# Altium PCB ADCS_Sensor_Simulator_FIXED3-4-15.PcbDoc
Units mm, origin at the board's own origin, x right, y up, seen from the top; angles counter-clockwise.
Board outline 44.83 x 79.25 mm, 2 copper layers (Top Layer, Bottom Layer); 45 components, 40 nets, 211 pads, 56 vias.
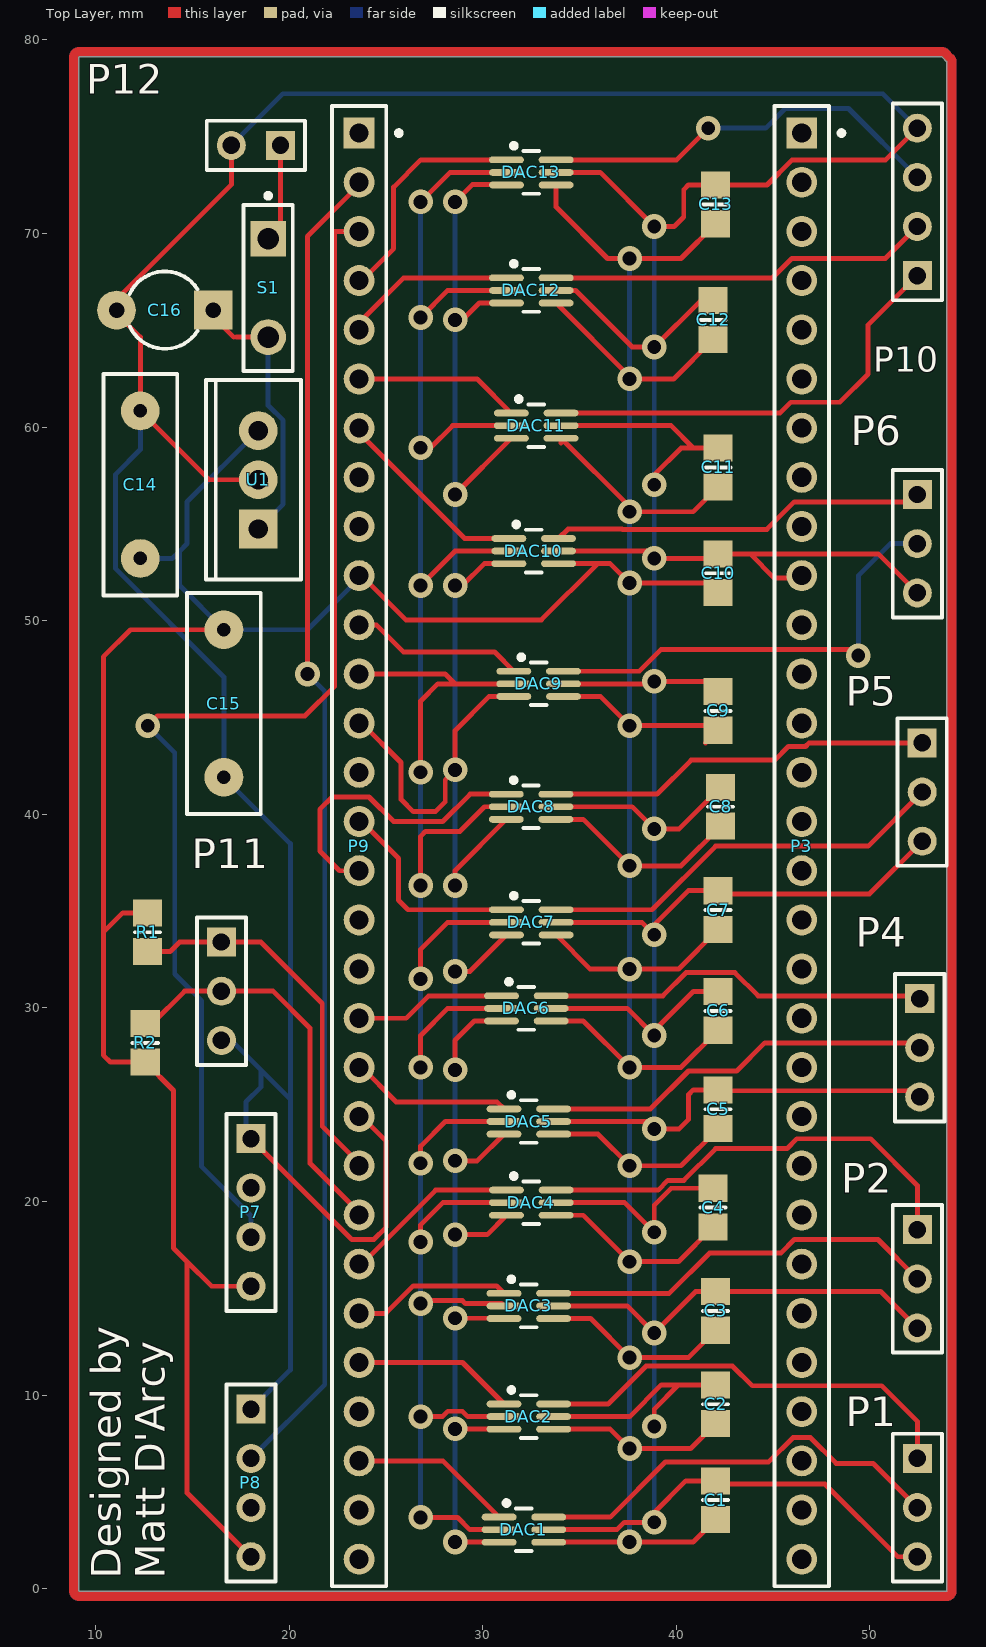
[diagram p0: Top Layer view]
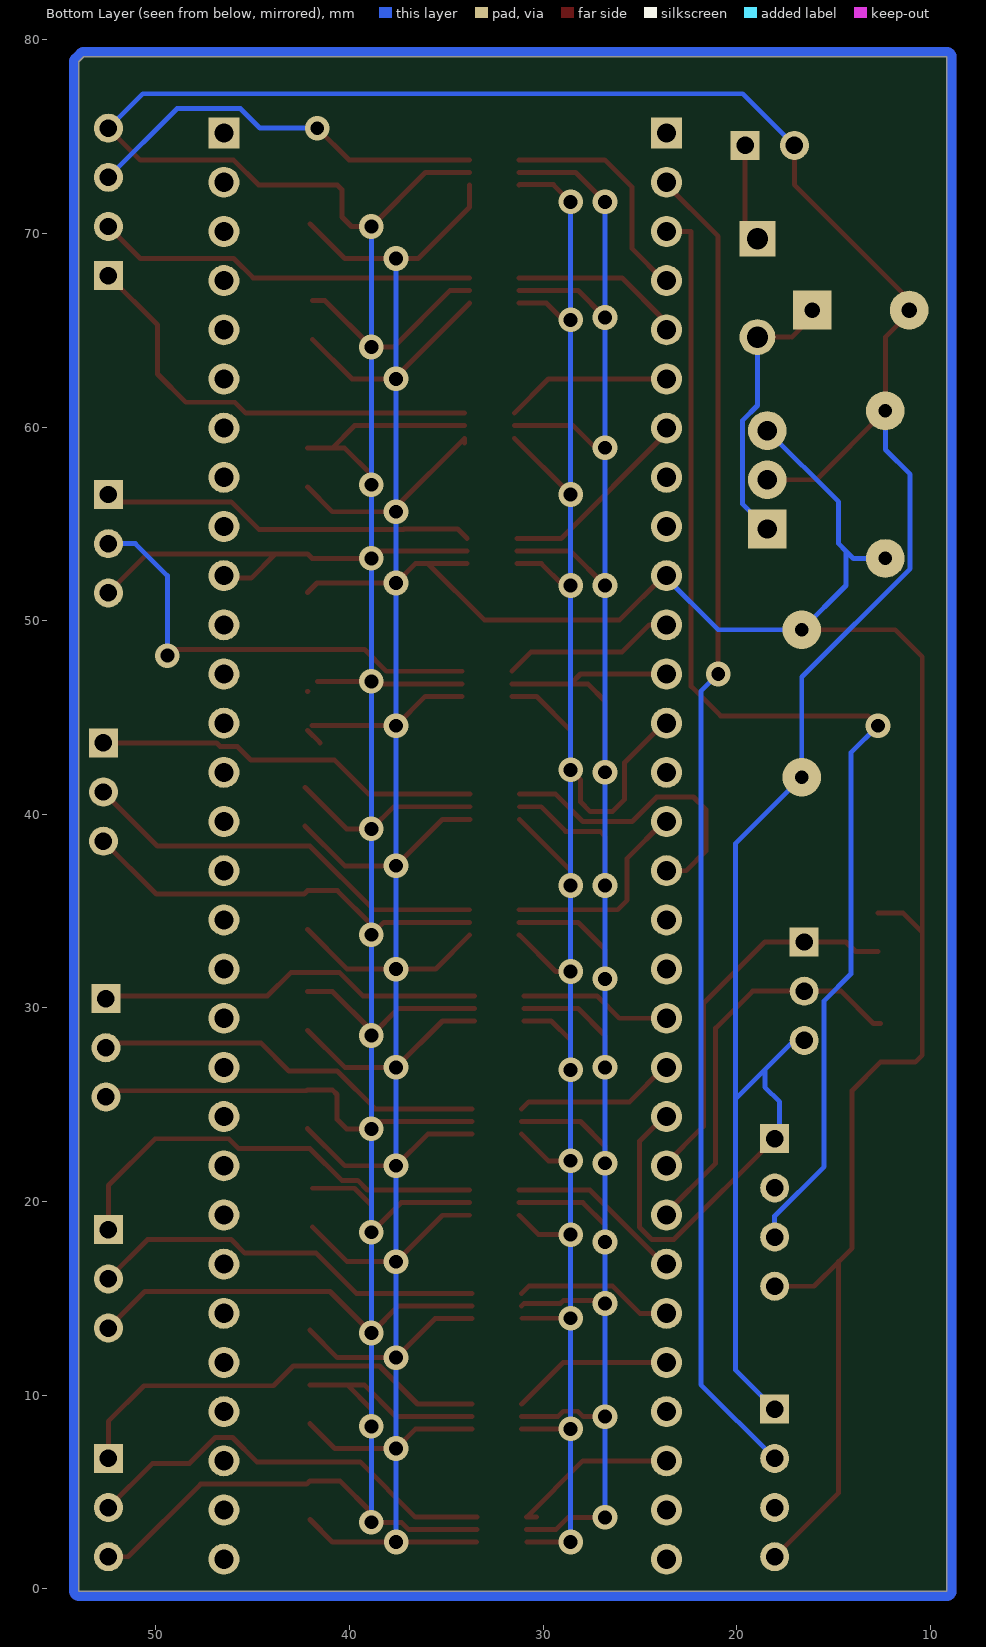
[diagram p1: Bottom Layer view, seen from below]

## Layer stack, top to bottom
Top Layer: signal copper 0.0356
Dielectric: dielectric 0.32, FR-4, Dk 4.8
Bottom Layer: signal copper 0.0356

## Board outline
9.144,78.994 9.144,-0.127 53.975,-0.127 53.975,78.867 53.721,79.121 9.144,79.121

## Design rules (kind name [scope] priority, off if disabled: settings)
Clearance [All] p1: gap=0.15
PolygonConnect [All] p1: connectstyle=Relief reliefconductorwidth=0.254 reliefentries=4 polygonreliefangle="90 Angle" airgapwidth=0.254
RoutingVias [All] p1: holewidth=0.711 width=1.27 viastyle="Through Hole" minholewidth=0.711 minwidth=1.27 maxholewidth=0.711 maxwidth=1.27
SolderMaskExpansion [All] p1: expansion=0.102
Width [All] p1: maxlimit=0.254 minlimit=0.254 preferedwidth=0.254
28 further rules are at their usual default settings.

## Components (designator, comment, footprint, x,y, rotation, side; value= is the part's Value field where it differs from the comment)
C1 "Regulator" 6-0805_M 42.037,4.572 r90 top
C2 "Regulator" 6-0805_M 42.037,9.525 r90 top
C3 "Regulator" 6-0805_M 42.037,14.351 r90 top
C4 "Regulator" 6-0805_M 41.91,19.685 r90 top
C5 "Regulator" 6-0805_M 42.164,24.765 r90 top
C6 "Regulator" 6-0805_M 42.164,29.845 r90 top
C7 "Regulator" 6-0805_M 42.164,35.052 r90 top
C8 "Regulator" 6-0805_M 42.291,40.386 r90 top
C9 "Regulator" 6-0805_M 42.164,45.339 r90 top
C10 "Regulator" 6-0805_M 42.164,52.451 r90 top
C11 "Regulator" 6-0805_M 42.164,57.912 r90 top
C12 "Regulator" 6-0805_M 41.91,65.532 r90 top
C13 "Regulator" 6-0805_M 42.037,71.501 r90 top
C14 "Regulator" RAD-0.3 12.319,57.023 r90 top
C15 "Regulator" RAD-0.3 16.637,45.72 r270 top
C16 "Bypass" CAPR5-4X5 13.589,66.04 r180 top
DAC1 "LTC2630" LTC2630 32.131,3.048 r0 top
DAC2 "LTC2630" LTC2630 32.385,8.89 r0 top
DAC3 "LTC2630" LTC2630 32.385,14.605 r0 top
DAC4 "LTC2630" LTC2630 32.512,19.939 r0 top
DAC5 "LTC2630" LTC2630 32.385,24.13 r0 top
DAC6 "LTC2630" LTC2630 32.258,29.972 r0 top
DAC7 "LTC2630" LTC2630 32.512,34.417 r0 top
DAC8 "LTC2630" LTC2630 32.501,40.386 r0 top
DAC9 "LTC2630" LTC2630 32.893,46.736 r0 top
DAC10 "LTC2630" LTC2630 32.639,53.594 r0 top
DAC11 "LTC2630" LTC2630 32.766,60.071 r0 top
DAC12 "LTC2630" LTC2630 32.512,67.056 r0 top
DAC13 "LTC2630" LTC2630 32.512,73.152 r0 top
P1 "Sun1" HDR1X3 52.451,6.731 r270 top
P2 "Sun2" HDR1X3 52.451,18.542 r270 top
P3 "ATMEGA128-RIGHT" HDR1X30 46.482,75.184 r270 top
P4 "Sun3" HDR1X3 52.578,30.48 r270 top
P5 "Sun4" HDR1X3 52.705,43.688 r270 top
P6 "Sun5" HDR1X3 52.451,56.515 r270 top
P7 "Serial-ToPC" HDR1X4 18.034,23.241 r270 top
P8 "Serial-FromPC" HDR1X4 18.034,9.271 r270 top
P9 "ATMEGA128-LEFT" HDR1X30 23.622,75.184 r270 top
P10 "Mag" HDR1X4 52.451,67.818 r90 top
P11 "Gyro I2C" HDR1X3 16.51,33.401 r270 top
P12 "12V In" HDR1X2 19.558,74.549 r180 top
R1 "SCL Pullup" 6-0805_M 12.7,33.909 r270 top
R2 "SDA Pullup" 6-0805_M 12.573,28.194 r90 top
S1 "ON/OFF" SPST-2 18.923,67.183 r270 top
U1 "MC7800" 221A-06 18.415,57.277 r90 top

## Footprints (in the part's own frame and the unit in brackets; to place one, negate y for a bottom-side part, rotate by r counter-clockwise, add the part's x,y. Pads: shape width x height; smd on the part's side, far side on the other; paste and mask are expansions set on the pad)
6-0805_M [mm] "Chip Resistor, Body 2.0x1.2mm, IPC Low Density"
  rect 1.4x1.5 smd: 1(-1,0) 2(1,0)
  silkscreen extent 0,-0.65 0,0.65, body extent -1.07,-0.7 1.07,0.7, height 0.7
221A-06 [mm] "TO, Thru-Hole, Vertical, Heatsink Mounted; 3 In-Line Leads; Pitch 2.54 mm"
  rect 2x2 hole 1: 1(-2.54,0)
  round 2 hole 1: 2(0,0) 3(2.54,0)
  silkscreen extent -5.15,-2.2 5.15,2.7
CAPR5-4X5 [mm] "Capacitor; 2 Leads"
  rect 2x2 hole 0.8: 1(-2.5,0)
  round 2 hole 0.8: 2(2.5,0)
  silkscreen extent -1.69,-2 1.82,2
HDR1X2 [mm] "Connector; Header; 2 Position"
  rect 1.5x1.5 hole 0.9: 1(0,0)
  round 1.5 hole 0.9: 2(2.54,0)
  silkscreen extent -1.27,-1.27 3.81,1.27
HDR1X3 [mm] "Connector; Header; 3 Position"
  rect 1.5x1.5 hole 0.9: 1(0,0)
  round 1.5 hole 0.9: 2(2.54,0) 3(5.08,0)
  silkscreen extent -1.27,-1.27 6.35,1.27
HDR1X4 [mm] "Connector; Header; 4 Position"
  rect 1.5x1.5 hole 0.9: 1(0,0)
  round 1.5 hole 0.9: 2(2.54,0) 3(5.08,0) 4(7.62,0)
  silkscreen extent -1.27,-1.27 8.89,1.27
HDR1X30 [mm] "Connector; Header; 30 Position"
  rect 1.6x1.6 hole 0.99: 1(0,0)
  round 1.6 hole 0.99: 2(2.54,0) 3(5.08,0) 4(7.62,0) 5(10.16,0) 6(12.7,0) 7(15.24,0) 8(17.78,0) 9(20.32,0) 10(22.86,0) 11(25.4,0) 12(27.94,0) 13(30.48,0) 14(33.02,0) 15(35.56,0) 16(38.1,0) 17(40.64,0) 18(43.18,0) 19(45.72,0) 20(48.26,0) 21(50.8,0) 22(53.34,0) 23(55.88,0) 24(58.42,0) 25(60.96,0) 26(63.5,0) 27(66.04,0) 28(68.58,0) 29(71.12,0) 30(73.66,0)
  silkscreen extent -1.4,-1.4 75.06,2.18
LTC2630 [mm] "TSOP, 6-Leads, Body 2.00x1.25mm, Pitch 0.65mm, IPC Low Density"
  oval 1.8x0.35 smd: 1(-1.281,0.65) 2(-1.281,0) 3(-1.281,-0.65) 4(1.281,-0.65) 5(1.281,0) 6(1.281,0.65)
  silkscreen extent -1.02,-1.1 0.4,1.5, body extent -0.7,-1.1 0.7,1.1, height 1
RAD-0.3 [mm] "Radial Cap, Thru-Hole; 2 Leads; 0.3 in Pin Spacing"
  round 2 hole 0.7: 1(-3.81,0) 2(3.81,0)
  silkscreen extent -5.71,-1.91 5.71,1.91
SPST-2 [mm] "Switch; 2 Leads"
  rect 1.85x1.85 hole 1.1: 1(-2.54,0)
  round 1.85 hole 1.1: 2(2.54,0)
  silkscreen extent -4.89,-1.27 4.28,1.27

## Part data
C1 C2 C3 C4 C5 C6 C7 C8 C9 C10 C11 C12 C13 C14 C15: library part Cap, "Capacitor"
C16: library part Cap2, "Capacitor"
P1 P2 P4 P5 P6 P11: library part "Header 3", "Header, 3-Pin"
P3 P9: library part "Header 30", "Header, 30-Pin"
P7 P8 P10: library part "Header 4", "Header, 4-Pin"
P12: library part "Header 2", "Header, 2-Pin"
R1 R2: library part Res2, "Resistor"
S1: library part SW-PB, "Switch"
U1: library part MC7805ACT, "Three-Terminal Positive Voltage Regulator"

## Via types
v1: diameter 1.27, hole 0.711, Top Layer to Bottom Layer, 56 vias

## Nets (pads, with @x,y where several pads share a name; then routed paths per layer and width w, separated by ;. In a path a pad name is that pad's centre, name@x,y a point inside that pad or via, vN(x,y) a via of type N, cw(c..) or ccw(c..) an arc to the next point about the centre after c; other vN are vias at no path point)
AZ1: DAC2.6 P1.1 | length 22.7
  Top Layer w0.254: DAC2.6 36.484,9.54 38.446,11.502 42.902,11.502 43.924,10.48 50.612,10.48 52.451,8.641 P1.1
AZ2: DAC4.6 P2.1 | length 23
  Top Layer w0.254: DAC4.6 39.068,20.589 39.568,21.089 40.393,21.089 42.037,22.733 45.721,22.733 46.229,23.241 50.038,23.241 52.451,20.828 P2.1
AZ3: DAC6.6 P4.1 | length 20.1
  Top Layer w0.254: DAC6.6 39.305,30.622 40.505,31.822 43.029,31.822 44.229,30.622 52.436,30.622 P4.1
AZ4: DAC8.6 P5.1 | length 20
  Top Layer w0.254: DAC8.6 39.004,41.036 40.767,42.799 45.085,42.799 45.786,43.5 46.674,43.5 46.862,43.688 P5.1
AZ5: DAC10.6 P6.1 | length 19.5
  Top Layer w0.254: DAC10.6 34.413,54.737 37.191,54.737 37.214,54.714 44.682,54.714 46.102,56.134 52.07,56.134 P6.1
EL1: DAC1.6 P1.2 | length 22.2
  Top Layer w0.254: DAC1.6 36.591,3.698 39.442,6.549 44.777,6.549 46.036,7.808 46.929,7.808 48.26,6.477 50.165,6.477 P1.2
EL2: DAC3.6 P2.2 | length 20.8
  Top Layer w0.254: DAC3.6 39.639,15.255 41.719,17.335 45.403,17.335 46.102,18.034 50.419,18.034 P2.2
EL3: DAC5.6 P4.2 | length 20.4
  Top Layer w0.254: DAC5.6 38.67,24.78 40.632,26.742 43.125,26.742 44.577,28.194 52.324,28.194 P4.2
EL4: DAC7.6 P5.2 | length 21.4
  Top Layer w0.254: DAC7.6 38.75,35.067 42.037,38.354 49.911,38.354 P5.2
EL5: DAC9.6 P6.2 | length 23.7
  Top Layer w0.254: DAC9.6 38.095,47.386 39.223,48.514 49.083,48.514 v1(49.403,48.194)
  Bottom Layer w0.254: v1(49.403,48.194) 49.403,52.324 51.054,53.975 P6.2
GND: C1.2 C2.2 C3.2 C4.2 C5.2 C6.2 C7.2 C8.2 C9.2 C10.2 C11.2 C12.2 C13.2 C14.2 C15.2 C16.2 DAC1.5 DAC2.5 DAC3.5 DAC4.5 DAC5.5 DAC6.5 DAC7.5 DAC8.5 DAC9.5 DAC10.5 DAC11.5 DAC12.5 DAC13.5 P1.3 P2.3 P3.10 P4.3 P5.3 P6.3 P7.1 P8.1 P9.21 P10.4 P11.3 P12.2 U1.2 | length 412.7
  Top Layer w0.254: C16.2@10.541,66.04 17.018,72.517 P12.2 ; C16.2@10.922,66.04 12.319,64.643 C14.2 15.875,57.277 U1.2 ; P7.1 23.241,18.034 24.384,18.034 25.019,18.669 25.019,23.114 P9.21@23.749,24.384 ; DAC1.5 36.932,3.048 37.313,3.429 v1(38.862,3.429) 38.862,3.937 40.497,5.572 C1.2 42.209,5.4 47.686,5.4 51.435,1.651 P1.3 ; DAC6.5 37.465,29.972 v1(38.862,28.575) 38.862,28.829 40.878,30.845 C6.2 ; DAC2.5 37.592,8.89 39.227,10.525 40.116,10.525 ; DAC3.5 37.465,14.605 v1(38.862,13.208) 41.005,15.351 C3.2 50.562,15.351 P2.3 ; DAC5.5 38.481,24.13 v1(38.862,23.749) 40.148,23.749 40.64,24.241 40.64,25.527 40.878,25.765 C5.2 42.209,25.72 52.258,25.72 P4.3 ; DAC8.5 37.719,40.386 v1(38.862,39.243) 40.148,39.243 C8.2 ; DAC4.5 37.338,19.939 v1(38.862,18.415) 38.862,19.812 39.735,20.685 C4.2 ; DAC7.5 38.227,34.417 v1(38.862,33.782) 38.862,34.29 40.624,36.052 C7.2 42.336,35.88 49.977,35.88 P5.3 ; DAC12.5 34.798,67.056 37.719,64.135 v1(38.862,64.135) 41.259,66.532 C12.2 ; DAC13.5 36.068,73.152 v1(38.862,70.358) 39.894,70.358 40.386,70.85 40.386,72.263 40.624,72.501 C13.2 44.689,72.501 45.975,73.787 50.8,73.787 P10.4 ; DAC10.5 38.481,53.594 v1(38.862,53.213) 41.926,53.213 C10.2 43.815,53.451 ; DAC11.5 39.735,60.071 40.894,58.912 ; DAC9.5 38.735,46.736 v1(38.862,46.863) C9.2@41.64,46.863 ; v1(38.862,8.382) 38.862,9.271 40.116,10.525 ; v1(38.862,57.023) 38.862,57.531 40.243,58.912 40.894,58.912 ; C2.2 40.116,10.525 ; C9.2@42.148,46.355 C9.2 ; C11.2 40.894,58.912 ; P3.10@46.228,52.197 45.069,52.197 43.815,53.451 ; P6.3 50.435,53.451 43.815,53.451
  Bottom Layer w0.254: C14.2 12.319,58.84 11.042,57.563 11.042,52.684 16.637,47.089 C15.2 20.066,38.481 20.066,25.273 ; P11.3 17.018,28.321 18.542,26.797 ; P12.2 19.685,77.216 50.673,77.216 P10.4 ; P8.1 20.066,11.303 20.066,25.273 ; P7.1 17.78,23.495 17.78,25.146 18.542,25.908 18.542,26.797 ; U1.2@18.161,57.277 U1.2 ; v1(38.862,3.429) v1(38.862,8.382) v1(38.862,13.208) v1(38.862,18.415) v1(38.862,23.749) v1(38.862,28.575) v1(38.862,33.782) v1(38.862,39.243) v1(38.862,46.863) v1(38.862,53.213) v1(38.862,57.023) v1(38.862,64.135) v1@38.862,70.231 ; 18.542,26.797 20.066,25.273
MAGX: DAC11.6 P10.1 | length 22.8
  Top Layer w0.254: DAC11.6 45.354,60.721 45.913,61.28 48.453,61.28 49.911,62.738 49.911,65.278 P10.1
MAGY: DAC12.6 P10.2 | length 19.8
  Top Layer w0.254: DAC12.6 44.974,67.706 45.975,68.707 50.8,68.707 P10.2
MAGZ: DAC13.6 P10.3 | length 21.2
  Top Layer w0.254: DAC13.6 40.02,73.802 v1(41.656,75.438)
  Bottom Layer w0.254: v1(41.656,75.438) 44.617,75.438 45.633,76.454 48.895,76.454 P10.3
NetC16_1: C16.1 S1.2 U1.1 | length 14.4
  Top Layer w0.254: C16.1@15.748,66.04 17.145,64.643 ; 17.272,64.643 S1.2
  Bottom Layer w0.254: U1.1 19.692,56.014 19.692,60.346 18.923,61.115 S1.2
NetP7_3: P7.3 P9.3 | length 64
  Top Layer w0.254: v1(12.7,44.577) 13.208,45.085 20.828,45.085 22.352,46.609 22.352,70.104 P9.3@23.749,70.104
  Bottom Layer w0.254: v1(12.7,44.577) 14.097,43.18 14.097,31.75 15.483,30.364 15.483,21.8 18.034,19.249 P7.3
NetP8_2: P8.2 P9.2 | length 69
  Top Layer w0.254: v1(20.955,47.244) 20.955,69.85 P9.2@23.749,72.644
  Bottom Layer w0.254: P8.2 21.844,10.541 21.844,46.355 v1(20.955,47.244)
NetP9_8: P9.8
NetP9_9: P9.9
NetP9_27: P9.27
NetP9_29: P9.29
PB0: DAC9.1 P9.11 | length 9.1
  Top Layer w0.254: P9.11@23.899,49.634 23.749,49.784 24.511,49.784 25.908,48.387 30.611,48.387 DAC9.1
PB4: DAC7.1 P9.15 | length 10.6
  Top Layer w0.254: P9.15@23.749,39.624 25.654,37.719 25.654,35.56 26.147,35.067 DAC7.1
PB5: DAC8.1 P9.16 | length 15.6
  Top Layer w0.254: P9.16 22.606,37.084 21.59,38.1 21.59,40.259 22.225,40.894 24.13,40.894 25.4,39.624 27.94,39.624 29.352,41.036 DAC8.1
PD2: DAC4.1 P9.24 | length 9.1
  Top Layer w0.254: P9.24@23.749,16.764 27.574,20.589 DAC4.1
PD3: DAC3.1 P9.25 | length 8.1
  Top Layer w0.254: P9.25@23.749,14.224 24.999,14.224 26.419,15.644 30.715,15.644 DAC3.1
PD4: DAC2.1 P9.26 | length 8.2
  Top Layer w0.254: P9.26@23.749,11.684 28.96,11.684 DAC2.1
PD6: DAC1.1 P9.28 | length 8.8
  Top Layer w0.254: P9.28@23.749,6.604 27.944,6.604 DAC1.1 DAC1.1@30.338,3.698
PE2: DAC13.1 P9.4 | length 11.9
  Top Layer w0.254: P9.4@23.749,67.564 25.4,69.215 25.4,72.39 26.812,73.802 DAC13.1
PE3: DAC12.1 P9.5 | length 8.9
  Top Layer w0.254: P9.5@23.749,65.024 23.749,65.532 25.923,67.706 DAC12.1
PE4: DAC11.1 P9.6 | length 8.5
  Top Layer w0.254: P9.6@23.749,62.484 29.722,62.484 DAC11.1
PE5: DAC10.1 P9.7 | length 10.2
  Top Layer w0.254: P9.7@23.749,59.944 23.749,59.563 29.068,54.244 DAC10.1
PG3: DAC6.1 P9.19 | length 7.7
  Top Layer w0.254: P9.19@23.749,29.464 26.055,29.464 27.213,30.622 DAC6.1
PG4: DAC5.1 P9.20 | length 8.2
  Top Layer w0.254: P9.20@23.749,26.924 25.527,25.146 30.738,25.146 DAC5.1
POWER: P12.1 S1.1 | length 5.1
  Top Layer w0.254: S1.1 19.558,70.358 P12.1
"SPI - MOSI": DAC1.3 DAC2.3 DAC3.3 DAC4.3 DAC5.3 DAC6.3 DAC7.3 DAC8.3 DAC9.3 DAC10.3 DAC11.3 DAC12.3 DAC13.3 P9.13 | length 123.6
  Top Layer w0.254: P9.13@23.749,44.704 25.781,42.672 25.781,40.767 26.416,40.132 27.559,40.132 28.067,40.64 28.067,41.783 v1(28.575,42.291) 28.575,44.323 30.338,46.086 DAC9.3 ; v1(28.575,2.413) DAC1.3@30.835,2.413 ; v1(28.575,8.255) 31.089,8.255 DAC2.3 ; v1(28.575,13.97) DAC3.3@31.089,13.97 ; v1(28.575,18.288) 30.23,18.288 DAC4.3 ; v1(28.575,22.098) 29.722,22.098 DAC5.3 ; v1(28.575,26.797) 28.575,28.321 29.576,29.322 DAC6.3 ; v1(28.575,31.877) 29.341,31.877 DAC7.3 ; v1(28.575,36.322) 28.575,37.091 DAC8.3 ; v1(28.575,51.816) 28.956,51.816 30.084,52.944 DAC10.3 ; v1(28.575,56.515) 31.481,59.421 DAC11.3 ; v1(28.575,65.532) 28.956,65.532 29.83,66.406 DAC12.3 ; v1(28.575,71.628) 29.464,72.517 31.216,72.517 DAC13.3
  Bottom Layer w0.254: v1@28.575,2.286 v1(28.575,2.413) v1(28.575,8.255) v1(28.575,13.97) v1(28.575,18.288) v1(28.575,22.098) v1(28.575,26.797) v1(28.575,31.877) v1(28.575,36.322) v1(28.575,42.291) v1(28.575,51.816) v1(28.575,56.515) v1(28.575,65.532) v1@28.575,71.501
"SPI - SCK": DAC1.2 DAC2.2 DAC3.2 DAC4.2 DAC5.2 DAC6.2 DAC7.2 DAC8.2 DAC9.2 DAC10.2 DAC11.2 DAC12.2 DAC13.2 P9.12 | length 148.4
  Top Layer w0.254: P9.12@23.749,47.244 28.067,47.244 28.575,46.736 ; v1(26.797,3.683) 28.702,3.683 29.337,3.048 DAC1.2 ; v1(26.797,8.89) 27.92,8.89 28.197,9.167 28.953,9.167 29.23,8.89 DAC2.2 ; v1(26.797,14.732) 26.947,14.882 28.953,14.882 29.103,14.732 30.977,14.732 DAC3.2 ; v1(26.797,17.907) 26.797,18.796 27.94,19.939 DAC4.2 ; v1(26.797,21.971) 26.797,22.86 28.067,24.13 DAC5.2 ; v1(26.797,26.924) 26.797,28.575 28.194,29.972 DAC6.2 ; v1(26.797,31.496) 26.797,33.02 28.194,34.417 DAC7.2 ; v1(26.797,36.322) 26.797,38.862 27.051,39.116 28.829,39.116 30.099,40.386 DAC8.2 ; v1(26.797,42.164) 26.797,45.847 27.686,46.736 28.575,46.736 ; v1(26.797,51.816) 28.575,53.594 DAC10.2 ; v1(26.797,58.928) 27.305,58.928 28.448,60.071 DAC11.2 ; v1@26.797,72.136 v1(26.797,71.628) 28.321,73.152 DAC13.2 ; v1@26.924,65.659 v1(26.797,65.659) 28.194,67.056 DAC12.2 ; DAC9.2 28.575,46.736
  Bottom Layer w0.254: v1(26.797,3.683) v1(26.797,8.89) v1(26.797,14.732) v1(26.797,17.907) v1(26.797,21.971) v1(26.797,26.924) v1(26.797,31.496) v1(26.797,36.322) v1(26.797,42.164) v1(26.797,51.816) v1(26.797,58.928) v1(26.797,65.659) v1(26.797,71.628)
"TWI - SCL": P9.22 P11.1 R1.2 | length 19.8
  Top Layer w0.254: R1.2 13.859,32.909 14.351,33.401 P11.1 18.542,33.401 21.717,30.226 21.717,23.876 P9.22@23.749,21.844
"TWI - SDA": P9.23 P11.2 R2.2 | length 20.7
  Top Layer w0.254: R2.2 12.938,29.194 14.605,30.861 P11.2 19.177,30.861 21.082,28.956 21.082,21.971 P9.23@23.749,19.304
VCC: C1.1 C2.1 C3.1 C4.1 C5.1 C6.1 C7.1 C8.1 C9.1 C10.1 C11.1 C12.1 C13.1 C14.1 C15.1 DAC1.4 DAC2.4 DAC3.4 DAC4.4 DAC5.4 DAC6.4 DAC7.4 DAC8.4 DAC9.4 DAC10.4 DAC11.4 DAC12.4 DAC13.4 P7.4 P8.4 P9.10 R1.1 R2.1 U1.3 | length 298
  Top Layer w0.254: R1.1 11.414,34.909 10.414,33.909 ; C15.1@16.698,49.591 C15.1 11.811,49.53 10.414,48.133 10.414,33.909 ; P8.4 14.732,4.953 14.732,16.891 ; P7.4 16.002,15.621 14.732,16.891 ; P9.10@23.749,52.324 26.035,50.038 33.035,50.038 35.941,52.944 ; DAC1.4@33.427,2.413 v1(37.587,2.413) 40.878,2.413 C1.1 ; DAC6.4 35.194,29.322 v1(37.592,26.924) 40.243,26.924 C6.1 ; DAC2.4 36.591,8.24 v1(37.592,7.239) 40.751,7.239 C2.1 ; DAC3.4 35.575,13.955 v1(37.592,11.938) 40.624,11.938 C3.1 ; DAC5.4 35.956,23.48 v1(37.592,21.844) 40.243,21.844 C5.1 ; DAC8.4 35.194,39.736 v1(37.592,37.338) 40.243,37.338 C8.1 ; DAC4.4 35.194,19.289 v1(37.592,16.891) 40.116,16.891 C4.1 ; DAC7.4 35.556,32.004 v1(37.592,32.004) 40.116,32.004 C7.1 ; DAC12.4 37.592,62.607 v1(37.592,62.484) 39.862,62.484 C12.1 ; DAC13.4 33.793,71.363 36.449,68.707 v1(37.592,68.707) 40.243,68.707 C13.1 ; DAC10.4 35.941,52.944 ; 34.047,59.171 DAC11.4 37.592,55.876 v1(37.592,55.626) 40.878,55.626 C11.1 ; DAC9.4 36.083,46.086 v1(37.592,44.577) C9.1@41.926,44.577 ; C9.1@41.513,43.688 C9.1 ; C10.1 41.672,51.943 v1(37.592,51.943) 36.591,52.944 35.941,52.944 ; 10.414,33.909 10.414,27.559 10.779,27.194 R2.1 14.034,25.734 14.034,17.59 14.732,16.891
  Bottom Layer w0.254: C14.1@12.319,53.721 C14.1 13.97,53.213 14.351,53.594 ; U1.3 14.732,56.134 14.732,53.975 14.351,53.594 ; P9.10@23.749,52.324 20.955,49.53 C15.1 14.351,51.816 14.351,53.594 ; v1(37.587,2.413) v1@37.587,68.707
pads on no net: P3.1 P3.2 P3.3 P3.4 P3.5 P3.6 P3.7 P3.8 P3.9 P3.11 P3.12 P3.13 P3.14 P3.15 P3.16 P3.17 P3.18 P3.19 P3.20 P3.21 P3.22 P3.23 P3.24 P3.25 P3.26 P3.27 P3.28 P3.29 P3.30 P7.2 P8.3 P9.1 P9.14 P9.17 P9.18 P9.30

## Other copper
Multi-Layer:
  lines w0.5: 8.894,-0.127 ccw(c9.144,-0.127) 9.144,-0.377 ; 8.894,-0.127 ccw(c9.144,-0.127) 9.144,-0.377 ; 8.894,-0.127 8.894,78.994 8.894,79.121 ; 8.894,79.121 cw(c9.144,79.121) 9.144,79.371 ; 8.894,79.121 cw(c9.144,79.121) 9.144,79.371 ; 9.144,-0.377 53.975,-0.377 ; 9.144,79.371 53.721,79.371 ; 53.721,79.371 cw(c53.721,79.121) 53.898,79.298 ; 53.721,79.371 cw(c53.721,79.121) 53.898,79.298 ; 53.898,79.298 ccw(c53.721,79.121) 53.898,79.298 ; 53.898,79.298 54.152,79.044 ; 53.898,79.298 53.898,79.298 ; 53.898,79.298 53.898,79.298 ; 53.975,-0.377 ccw(c53.975,-0.127) 54.225,-0.127 ; 53.975,-0.377 ccw(c53.975,-0.127) 54.225,-0.127 ; 54.152,79.044 cw(c53.975,78.867) 54.225,78.867 ; 54.152,79.044 ccw(c53.975,78.867) 54.152,79.044 ; 54.152,79.044 cw(c53.975,78.867) 54.225,78.867 ; 54.152,79.044 54.152,79.044 ; 54.152,79.044 54.152,79.044 ; 54.225,-0.127 54.225,78.867

## Silkscreen, mask and mechanical layers (free items; w line width, h text height)
Top Overlay:
  text "Designed by" at 11.303,0.508 h1.52 r90
  text "Matt D'Arcy" at 13.589,0.508 h1.52 r90